# EAGLE board encoder (EAGLE 6.4)
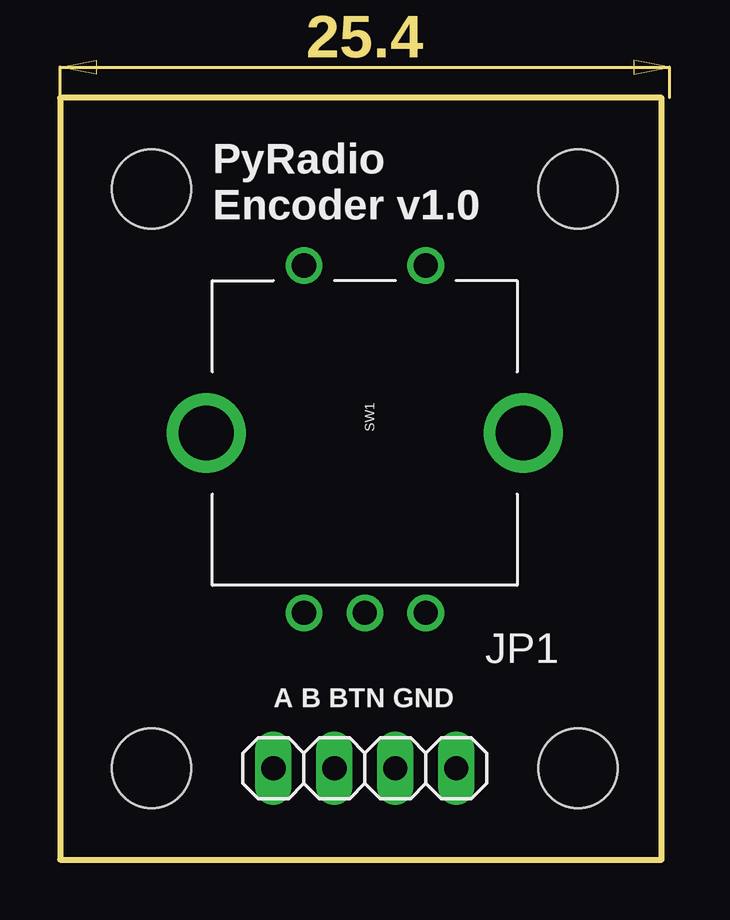
[diagram p0: board, top side]
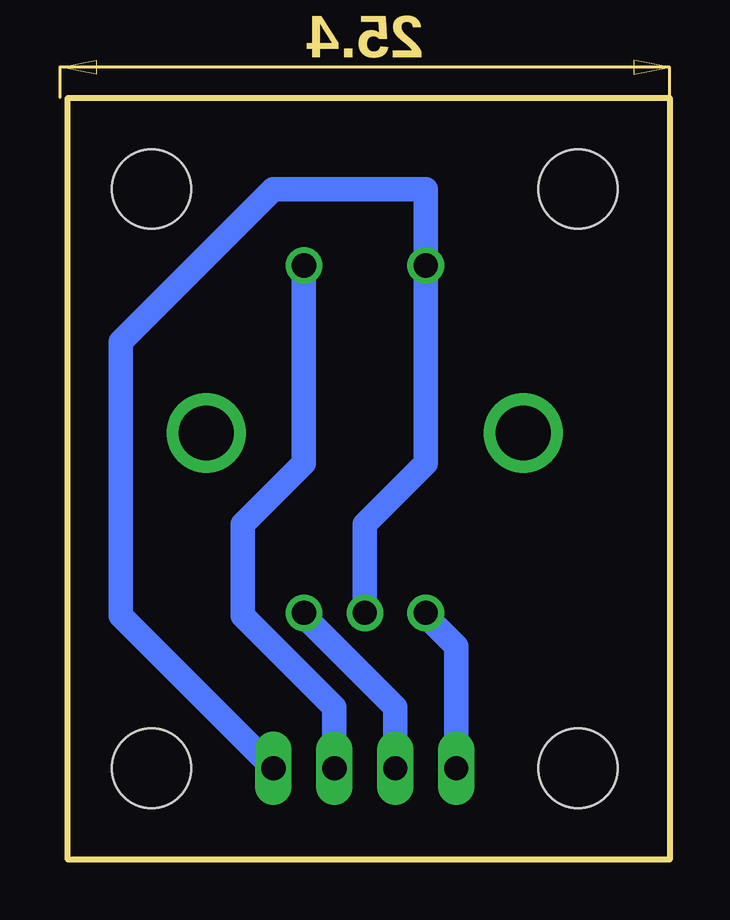
[diagram p1: board, bottom side, seen from below]

Size 25.07 x 31.74 mm. Coordinates in mm from the lower left corner, seen from the top.
Outline: 0,0 25.07,0 25.07,31.74 0,31.74 0,0
Copper layers (1*16): Top 0.035mm / dielectric 1.5mm / Bottom 0.035mm
Design rules "default": minimum track width 10mil, minimum drill 24mil, track to track 8mil, track to pad 8mil, pad to pad 8mil, via to via 8mil, smd to smd 8mil, copper to edge 40mil, drill to drill 8mil, minimum pad ring 10mil, minimum via ring 8mil, stop-mask expansion 4mil, vias tented up to drill 0mil, thermal gap 10mil

## Footprints (pad centres in the part's own frame; a part is rotated, then mirrored left to right if it is on the bottom)
1X04 = drill 1.016 long: 1 -3.81,0; 2 -1.27,0; 3 1.27,0; 4 3.81,0
STAND-OFF = hole 3.302: 0,0
ROTARY_ENC_PLAIN = drill 1.016: A 7.493,-2.54; B 7.493,2.54; C 7.493,0; SW+ -6.985,2.54; SW- -6.985,-2.54 | drill 2.286: P$3 0,6.604; P$4 0,-6.604

## Placement (x,y rotation side)
FRAME1  FRAME-LETTER  [CREATIVE_COMMONS]  1.27,33.02 0 top
JP1  [1X04]  12.7,3.81 0 top
STANDOFF1  STAND-OFF  [STAND-OFF]  21.59,3.81 0 top
STANDOFF2  STAND-OFF  [STAND-OFF]  3.81,3.81 0 top
STANDOFF3  STAND-OFF  [STAND-OFF]  3.81,27.94 0 top
STANDOFF4  STAND-OFF  [STAND-OFF]  21.59,27.94 0 top
SW1  ROTARTY_ENCODER  [ROTARY_ENC_PLAIN]  12.7,17.78 270 top

## Library data of the parts
FRAME1 = SparkFun-Aesthetics
JP1 = pinhead
STANDOFF1-STANDOFF4 SW1 = SparkFun-Electromechanical

## Nets
A: JP1.1 SW1.A
B: JP1.2 SW1.B
BTN: JP1.3 SW1.SW+
GND: JP1.4 SW1.C SW1.SW-

## Tracks (layer width: path | path; a pad name or v marks a point on that pad's centre or on a via)
A
  Bottom 0.254: 10.16,10.16 SW1.A
  Bottom 1.016: JP1.1 8.89,8.89 10.16,10.16
B
  Bottom 0.254: 15.24,10.16 SW1.B
  Bottom 1.016: JP1.2 11.43,6.35 15.24,10.16
BTN
  Bottom 1.016: JP1.3 13.97,6.35 17.78,10.16 17.78,13.97 15.24,16.51 SW1.SW+
GND
  Bottom 1.016: SW1.C 12.7,13.97 10.16,16.51 SW1.SW- 10.16,27.94 16.51,27.94 22.86,21.59 22.86,10.16 JP1.4

## Text on the board
tPlace: PyRadio / Encoder v1.0 | A B BTN GND